# Allegro board CAD_3.brd
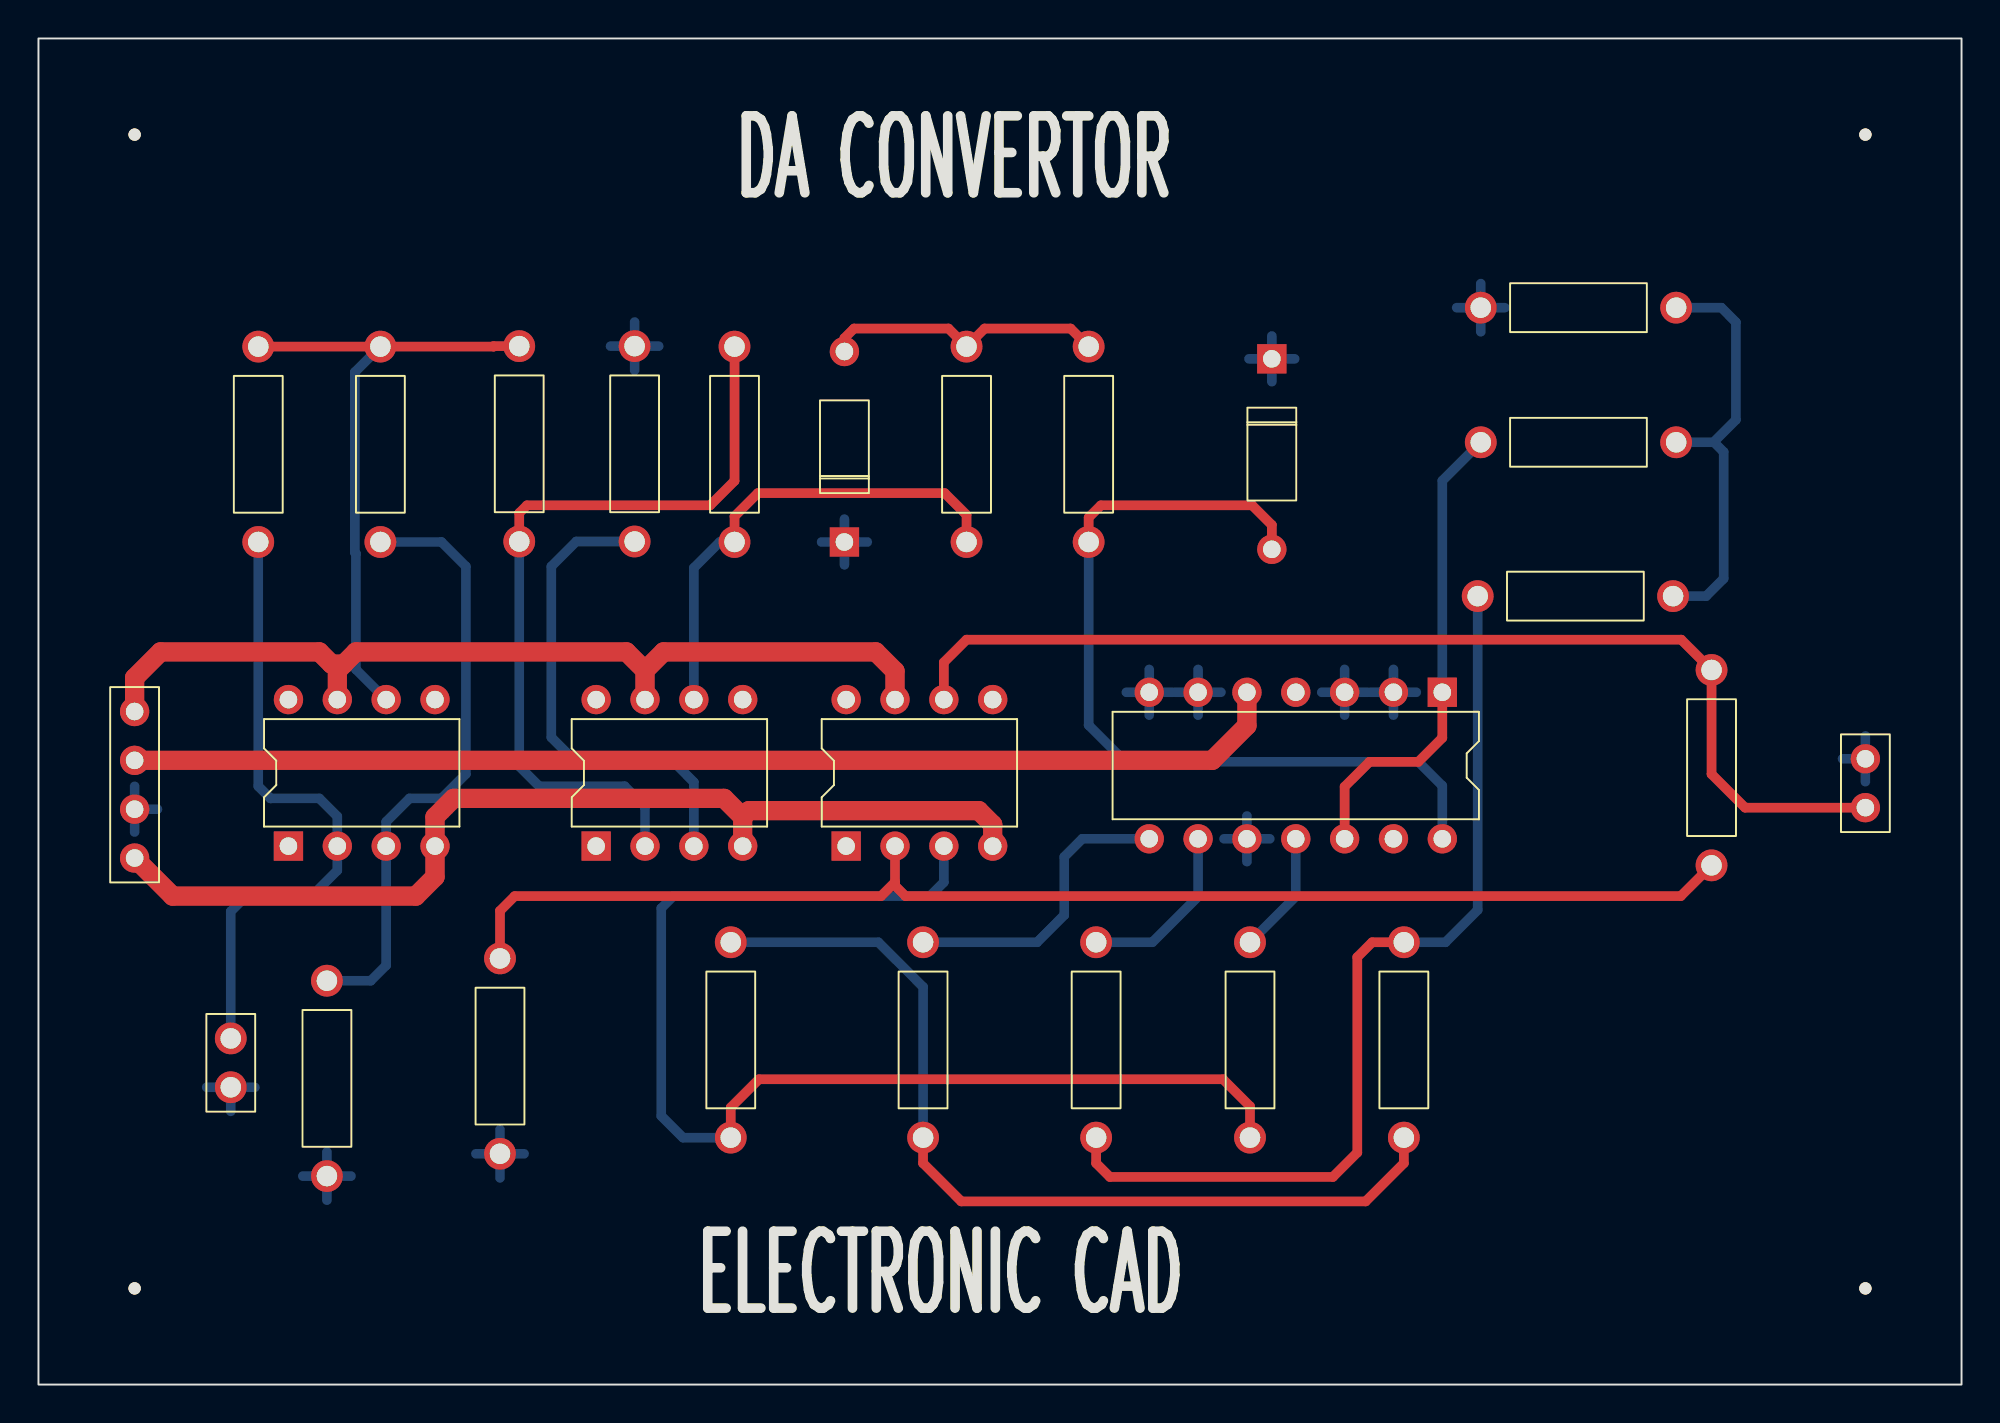
[diagram p0: board, top side]
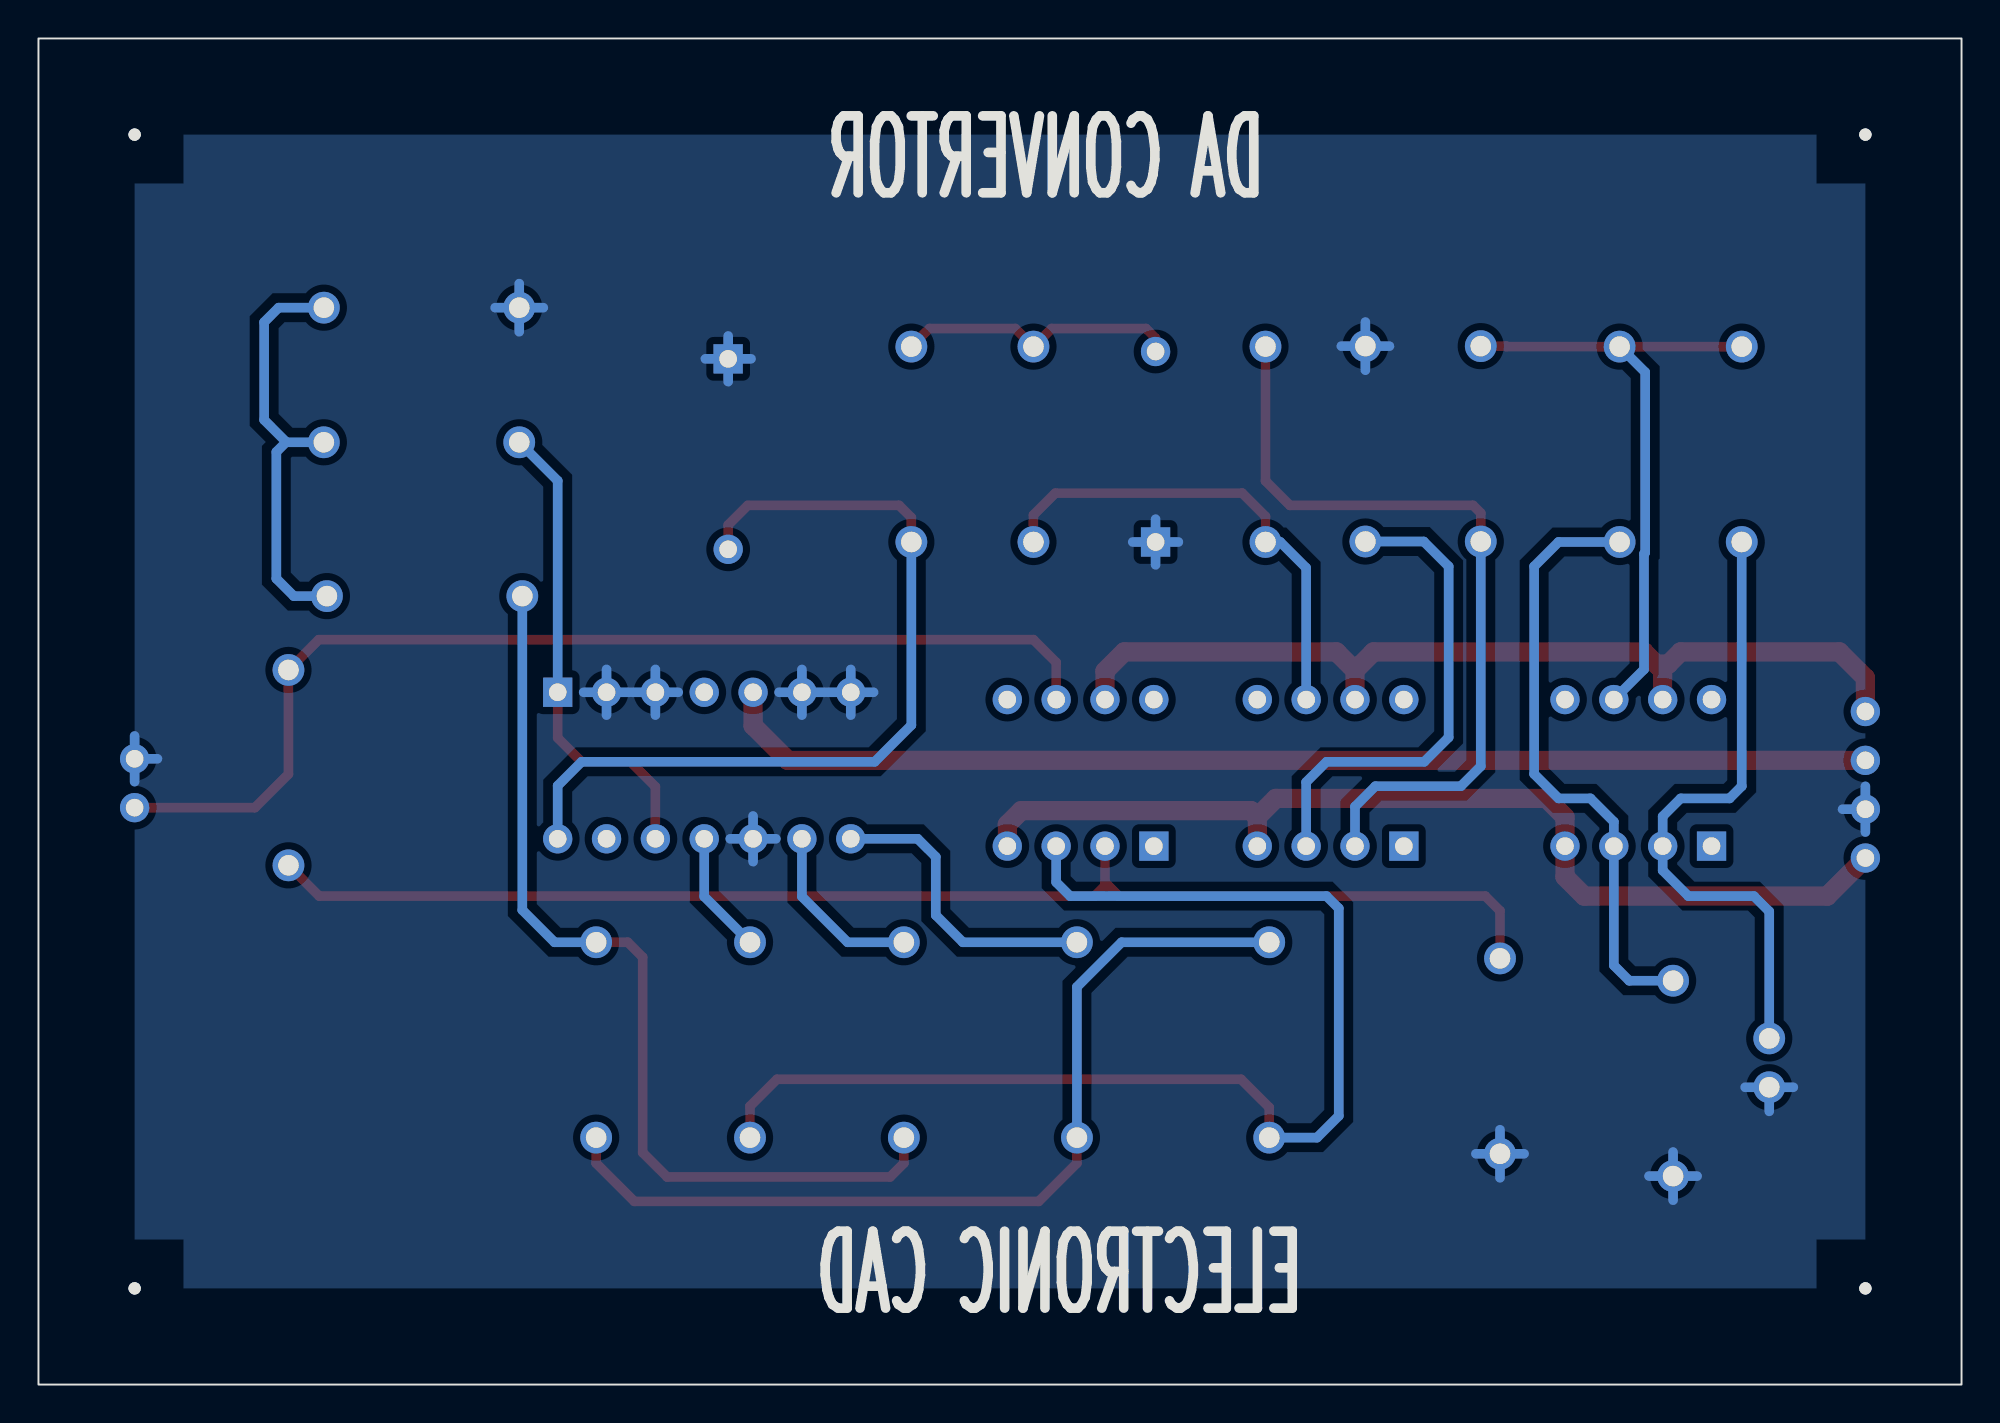
[diagram p1: board, bottom side, seen from below]

Outline 100 x 70 mm; copper layers: TOP, BOTTOM. Coordinates in mm from the lower left corner of the outline.
Outline path: rectangle 0,0 100,70

## Design rules (mm)
constraint set DEFAULT: min track width 0.5

## Placement (name value [footprint] x y rotation side)
C1  0.1uF  [CAPCK05]  10 18 180 top
D1  1N4148  [DO41]  41.91 43.81 0 top
D2  RD 5.6A  [DO41]  64.14 53.34 180 top
J1  CON2  [JUMPER2]  95 30 90 top
J2  CON4  [JUMPER4]  5 35 270 top
NOREF  -  [unnamed]  95 5 0 top
NOREF#2  -  [unnamed]  5 65 0 top
NOREF#3  -  [unnamed]  95 65 0 top
NOREF#4  -  [unnamed]  5 5 0 top
R1  10K  [RES400]  11.43 43.81 0 top
R2  5.1K  [RES400]  36.2 53.98 180 top
R3  10K  [RES400]  25 54 180 top
R4  1K  [RES400]  48.26 43.81 0 top
R5  1K  [RES400]  54.61 53.98 180 top
R6  10K  [RES400]  31 54 180 top
R7  6.8K  [RES400]  17.78 53.98 180 top
R8  1K  [RES400]  15 21 180 top
R9  22K  [RES400]  63 23 180 top
R10  22K  [RES400]  87 27 0 top
R11  10K  [RES400]  36 23 180 top
R12  22K  [RES400]  46 23 180 top
R13  10K  [RES400]  71 23 180 top
R14  22K  [RES400]  55 23 180 top
R15  10K  [RES400]  85 41 90 top
R16  10K  [RES400]  24 12 0 top
R17  22K  [RES400]  75 49 270 top
R18  10K  [RES400]  75 56 270 top
U1  LM741  [DIP8_3]  13 28 90 top
U2  LM741  [DIP8_3]  29 28 90 top
U3  74LS90  [DIP14_3]  73 36 270 top
U4  LM741  [DIP8_3]  42 28 90 top

## Library data of the parts
C1 = CAP NP: Tolerance: ***; User Part Number: ***
D1 = 1N4148
D2 = RD56EB
J1 = CON2: User Part Number: ***
J2 = CON4: User Part Number: ***
R1-R18 = R: Tolerance: ***; User Part Number: ***
U1 U2 U4 = LM741_1: Tolerance: ***; User Part Number: ***
U3 = 74LS90_6: Tolerance: ***; User Part Number: ***

## Footprints (pads in the part's own frame, mm; a bottom-side part is the same pattern mirrored in y, then rotated)
CAPCK05
  round 1.651 hole 1.067: 1(0,0) 2(0,2.54)
DIP8_3
  rect 1.524x1.524 hole 0.914: 1(0,0)
  round 1.524 hole 0.914: 2(0,-2.54) 3(0,-5.08) 4(0,-7.62) 5(7.62,-7.62) 6(7.62,-5.08) 7(7.62,-2.54) 8(7.62,0)
DIP14_3
  rect 1.524x1.524 hole 0.914: 1(0,0)
  round 1.524 hole 0.914: 2(0,-2.54) 3(0,-5.08) 4(0,-7.62) 5(0,-10.16) 6(0,-12.7) 7(0,-15.24) 8(7.62,-15.24) 9(7.62,-12.7) 10(7.62,-10.16) 11(7.62,-7.62) 12(7.62,-5.08) 13(7.62,-2.54) 14(7.62,0)
DO41
  rect 1.524x1.524 hole 0.914: 1(0,0)
  round 1.524 hole 0.914: 2(0,9.906)
JUMPER2
  round 1.524 hole 0.914: 1(0,0) 2(2.54,0)
JUMPER4
  round 1.524 hole 0.914: 1(0,0) 2(2.54,0) 3(5.08,0) 4(7.62,0)
RES400
  round 1.651 hole 1.067: 1(0,0) 2(0,10.16)
unnamed
  round 0.635 hole 3.175 unplated: (0,0)

## Nets
+5V: J2.2 U3.5
+12V: J2.1 U1.7(V-) U2.7(V-) U4.7(V-)
-12V: J2.4 U1.4 U2.4 U4.4
GND: C1.2 D1.1 D2.1 J1.2 J2.3 R6.1 R8.2 R16.1 R18.1 U3.2 U3.3 U3.6 U3.7(R92) U3.10
CLK: D2.2 R5.2 U3.14
OUT: J1.1 R10.2 U4.6
SIG: R9.2 R11.2 U4.3
N00264: C1.1 R1.1 U1.2
N00279: R1.2 R3.1 R7.1 U1.6
N00336: R7.2 R8.1 U1.3
N00641: R2.1 R3.2 U2.2
N00672: R2.2 R4.1 U2.6
N00699: D1.2 R4.2 R5.1
N00705: R6.2 U2.3
N01234: R17.1 U3.1 U3.12
N01253: R9.1 U3.11
N01268: R12.1 U3.8
N01283: R14.1 U3.9
N01471: R11.1 R12.2 R13.2
N01492: R13.1 R14.2 R15.2
N01501: R15.1 R17.2 R18.2
N02128: R10.1 R16.2 U4.2

Pads without a net: U1 1 5 8; U2 1 5 8; U3 4 13; U4 1 5 8

## Routing (per net, layer and track width the routed paths; a pad name or vN(x,y) marks a point on that pad's centre or on a via; arc(x,y) is an arc through that point)
+5V: length 60.3
  TOP w1: U3.5 62.84,34.26 61.04,32.46 J2.2
+12V: length 48.6
  TOP w1: 15.88,37.47 15.24,37.47 14.61,38.1 6.35,38.1 5,36.75 J2.1 ; 15.88,37.47 15.54,37.13 U1.7 ; 15.88,37.47 16.51,38.1 30.58,38.1 31.54,37.14 ; 31.54,37.14 32.5,38.1 43.54,38.1 44.54,37.1 U4.7 ; 31.54,37.14 U2.7
-12V: length 52.8
  TOP w1: J2.4 6.98,25.4 19.62,25.4 20.62,26.4 U1.4 20.62,29.52 21.58,30.48 35.66,30.48 36.62,29.52 ; 36.62,29.52 36.95,29.84 48.9,29.84 49.62,29.12 U4.4 ; 36.62,29.52 U2.4
GND: length 64.2
  BOTTOM w0.5: R16.1 24,13.25 ; R16.1 25.25,12 ; R16.1 24,10.75 ; R16.1 22.75,12 ; 70.46,34.81 U3.2 ; U3.2 69.27,36 ; U3.2 71.65,36 ; U3.2 70.46,37.19 ; 61.65,28.38 U3.10 ; U3.10 64.03,28.38 ; U3.10 62.84,27.19 ; U3.10 62.84,29.57 ; 64.14,52.15 D2.1 ; D2.1 65.32,53.34 ; D2.1 62.95,53.34 ; D2.1 64.14,54.53 ; 57.76,34.81 U3.7 ; U3.7 57.76,37.19 ; U3.7 56.57,36 ; U3.7 58.95,36 ; 60.3,34.81 U3.6 ; U3.6 59.11,36 ; U3.6 60.3,37.19 ; U3.6 61.49,36 ; 31,52.75 R6.1 ; R6.1 32.25,54 ; R6.1 29.75,54 ; R6.1 31,55.25 ; 66.73,36 U3.3 ; U3.3 67.92,34.81 ; U3.3 69.11,36 ; U3.3 67.92,37.19 ; 75,54.75 R18.1 ; R18.1 76.25,56 ; R18.1 73.75,56 ; R18.1 75,57.25 ; 95,31.35 J1.2 ; J1.2 95,33.73 ; J1.2 93.81,32.54 ; J2.3 6.19,29.92 ; J2.3 5,31.11 ; J2.3 5,28.73 ; R8.2 15,12.09 ; R8.2 13.75,10.84 ; R8.2 15,9.59 ; R8.2 16.25,10.84 ; D1.1 41.91,45 ; D1.1 40.72,43.81 ; D1.1 43.1,43.81 ; D1.1 41.91,42.63 ; 8.75,15.46 C1.2 ; C1.2 11.25,15.46 ; C1.2 10,14.21
CLK: length 44.7
  TOP w0.5: D2.2 64.14,44.7 63.12,45.72 55.24,45.72 54.61,45.09 R5.2
  BOTTOM w0.5: U3.14 73,31.14 71.75,32.38 56.52,32.38 54.61,34.29 R5.2
OUT: length 57.1
  TOP w0.5: U4.6 47.08,37.55 48.26,38.73 85.42,38.73 R10.2 87,31.75 88.75,30 J1.1
SIG: length 63.4
  TOP w0.5: R9.2 63,14.47 61.59,15.88 37.47,15.88 36,14.41 R11.2
  BOTTOM w0.5: U4.3 47.08,26.12 46.35,25.4 33.02,25.4 32.38,24.77 32.38,13.97 33.52,12.84 R11.2
N00264: length 33.3
  BOTTOM w0.5: C1.1 10,24.61 10.79,25.4 14.21,25.4 15.54,26.73 U1.2 15.54,29.54 14.6,30.48 12.06,30.48 11.43,31.11 R1.1
N00279: length 33.2
  TOP w0.5: R3.1 23.67,54 23.67,53.98 R7.1 11.43,53.98
  BOTTOM w0.5: R7.1 16.45,52.65 16.45,43.26 16.51,43.2 16.51,37.19 U1.6
N00336: length 31.8
  BOTTOM w0.5: R8.1 17.28,21 18.08,21.8 U1.3 18.08,29.27 19.29,30.48 20.95,30.48 22.23,31.75 22.23,42.55 20.95,43.81 R7.2
N00641: length 41.5
  TOP w0.5: R3.2 25,45.32 25.4,45.72 34.92,45.72 36.2,46.99 R2.1
  BOTTOM w0.5: U2.2 31.54,30.05 30.48,31.11 26.04,31.11 25,32.15 R3.2
N00672: length 25.3
  TOP w0.5: R4.1 48.26,45.22 47.12,46.35 37.41,46.35 36.2,45.15 R2.2
  BOTTOM w0.5: R2.2 35.42,43.81 34.08,42.47 U2.6
N00699: length 14.8
  TOP w0.5: R5.1 53.67,54.92 49.2,54.92 48.26,53.98 47.32,54.92 42.41,54.92 41.91,54.41 D1.2
N00705: length 25.5
  BOTTOM w0.5: R6.2 27.96,43.84 26.67,42.55 26.67,33.66 27.94,32.38 33.02,32.38 34.08,31.32 U2.3
N01234: length 25
  TOP w0.5: U3.12 67.92,31.09 69.22,32.38 71.75,32.38 73,33.63 U3.1
  BOTTOM w0.5: R17.1 73,47 U3.1
N01253: length 6.4
  BOTTOM w0.5: R9.1 65.38,25.38 U3.11
N01268: length 15.8
  BOTTOM w0.5: R12.1 51.93,23 53.34,24.41 53.34,27.44 54.28,28.38 U3.8
N01283: length 9.3
  BOTTOM w0.5: U3.9 60.3,25.38 57.92,23 R14.1
N01471: length 48.1
  TOP w0.5: R12.2 46,11.51 47.98,9.53 69.02,9.53 71,11.51 R13.2
  BOTTOM w0.5: R12.2 46,20.68 43.68,23 R11.1
N01492: length 49.5
  TOP w0.5: R14.2 55,11.51 55.72,10.79 67.31,10.79 68.58,12.06 68.58,22.23 69.36,23 R13.1
  BOTTOM w0.5: R13.1 73.16,23 74.84,24.68 R15.2
N01501: length 22.4
  BOTTOM w0.5: 87.1,49 R17.2 ; 87.1,49 87.13,49 87.63,48.5 87.63,41.91 86.72,41 R15.1 ; 87.1,49 88.27,50.16 88.27,55.24 87.51,56 R18.2
N02128: length 69
  TOP w0.5: R16.2 24,24.64 24.77,25.4 43.81,25.4 44.54,26.12 ; 44.54,26.12 44.54,25.95 45.09,25.4 85.4,25.4 R10.1 ; 44.54,26.12 U4.2

## Copper pours and planes (outline as drawn; the poured copper is in the pictures)
GND on BOTTOM: 5,5 5,65 95,65 95,5 ; 1 cut-out

## Text on the board
Board Geometry/Outline: ELECTRONIC CAD | DA CONVERTOR
DEVICE_TYPE_TOP: FIGURE | FINISHED_SIZE | 0.914 | 1.067 | 3.175 | DRILL CHART: TOP to BOTTOM | ALL UNITS ARE IN MILLIMETERS | PLATED | NON-PLATED | QTY | 48 | 38 | 4
